# EAGLE board CT_schematic (EAGLE 7.6.0)

Size 100 x 80 mm. Coordinates in mm from the lower left corner, seen from the top.
Outline: 0,0 100,0 100,80 0,80 0,0
Copper layers (1*16): Top 0.035mm / dielectric 1.5mm / Bottom 0.035mm
Design rules "default": minimum track width 10mil, minimum drill 24mil, track to track 8mil, track to pad 8mil, pad to pad 8mil, via to via 8mil, smd to smd 8mil, copper to edge 40mil, drill to drill 8mil, minimum pad ring 10mil, minimum via ring 8mil, stop-mask expansion 4mil, vias tented up to drill 0mil, thermal gap 10mil

## Footprints (pad centres in the part's own frame; a part is rotated, then mirrored left to right if it is on the bottom)
C0603 = smd 0.8 x 0.8: 1 -0.762,0; 2 0.762,0
C0402 = smd 0.5 x 0.5: 1 -0.508,0; 2 0.508,0
C0805 = smd 1.2 x 1.3: 1 -1.016,0; 2 1.016,0
C1206 = smd 1.3 x 1.6: 1 -1.524,0; 2 1.524,0
C1210 = smd 1.2 x 2.5: 1 -1.524,0; 2 1.524,0
EXV-9H = smd 3.505 x 1.676: 1 -2.857,0; 2 2.857,0
L0603 = smd 0.8 x 0.8: 1 -0.762,0; 2 0.762,0
PJ-037B_PACKAGE = drill 3.7 square: 1 12,0 | drill 3.2 square: 2 6,0
R0603 = smd 0.8 x 0.8: 1 -0.762,0; 2 0.762,0
LQFP100 = smd 0.3 x 1.2: 1 -6,-7.75; 2 -5.5,-7.75; 3 -5,-7.75; 4 -4.5,-7.75; 5 -4,-7.75; 6 -3.5,-7.75; 7 -3,-7.75; 8 -2.5,-7.75; 9 -2,-7.75; 10 -1.5,-7.75; 11 -1,-7.75; 12 -0.5,-7.75; 13 0,-7.75; 14 0.5,-7.75; 15 1,-7.75; 16 1.5,-7.75; 17 2,-7.75; 18 2.5,-7.75; 19 3,-7.75; 20 3.5,-7.75; 21 4,-7.75; 22 4.5,-7.75; 23 5,-7.75; 24 5.5,-7.75; 25 6,-7.75; 51 6,7.75; 52 5.5,7.75; 53 5,7.75; 54 4.5,7.75; 55 4,7.75; 56 3.5,7.75; 57 3,7.75; 58 2.5,7.75; 59 2,7.75; 60 1.5,7.75; 61 1,7.75; 62 0.5,7.75; 63 0,7.75; 64 -0.5,7.75; 65 -1,7.75; 66 -1.5,7.75; 67 -2,7.75; 68 -2.5,7.75; 69 -3,7.75; 70 -3.5,7.75; 71 -4,7.75; 72 -4.5,7.75; 73 -5,7.75; 74 -5.5,7.75; 75 -6,7.75 | smd 1.2 x 0.3: 26 7.75,-6; 27 7.75,-5.5; 28 7.75,-5; 29 7.75,-4.5; 30 7.75,-4; 31 7.75,-3.5; 32 7.75,-3; 33 7.75,-2.5; 34 7.75,-2; 35 7.75,-1.5; 36 7.75,-1; 37 7.75,-0.5; 38 7.75,0; 39 7.75,0.5; 40 7.75,1; 41 7.75,1.5; 42 7.75,2; 43 7.75,2.5; 44 7.75,3; 45 7.75,3.5; 46 7.75,4; 47 7.75,4.5; 48 7.75,5; 49 7.75,5.5; 50 7.75,6; 76 -7.75,6; 77 -7.75,5.5; 78 -7.75,5; 79 -7.75,4.5; 80 -7.75,4; 81 -7.75,3.5; 82 -7.75,3; 83 -7.75,2.5; 84 -7.75,2; 85 -7.75,1.5; 86 -7.75,1; 87 -7.75,0.5; 88 -7.75,0; 89 -7.75,-0.5; 90 -7.75,-1; 91 -7.75,-1.5; 92 -7.75,-2; 93 -7.75,-2.5; 94 -7.75,-3; 95 -7.75,-3.5; 96 -7.75,-4; 97 -7.75,-4.5; 98 -7.75,-5; 99 -7.75,-5.5; 100 -7.75,-6
SOT-23-6 = smd 1.1 x 0.6: 1 -1.4,0.95; 2 -1.4,0; 3 -1.4,-0.95; 4 1.4,-0.95; 5 1.4,0; 6 1.4,0.95
10100565 = smd 0.8 x 2.35: 1 0,0; 2 1.25,0; 3 2.55,0; 4 4.25,0; 5 5.43,0; 6 6.68,0; 7 7.93,0; 8 9.18,0; 9 11.67,0; 10 14.18,0; 11 15.43,0; 12 16.68,0; 13 17.93,0; 14 19.18,0; 15 21.68,0 | smd 1.5 x 3.1: 16 23.495,-1.375; 20 25.685,-22.875 | smd 1.55 x 3.1: 17 -1.815,-1.375; 21 -1.815,-22.875 | drill 1.1 pad 1.1: 18 21.68,-2.375; 19 0.68,-2.375
TST-110-05-T-D-RA = drill 1 pad 1.7 square: 1 0,0 | drill 1 pad 1.7: 2 0,2.54; 3 2.54,0; 4 2.54,2.54; 5 5.08,0; 6 5.08,2.54; 7 7.62,0; 8 7.62,2.54; 9 10.16,0; 10 10.16,2.54; 11 12.7,0; 12 12.7,2.54; 13 15.24,0; 14 15.24,2.54; 15 17.78,0; 16 17.78,2.54; 17 20.32,0; 18 20.32,2.54; 19 22.86,0; 20 22.86,2.54
TDFN-8/6MM = smd 0.3 x 0.75: 1 0,0; 2 0.5,0; 3 1,0; 4 1.5,0; 5 1.5,3; 6 1,3; 7 0.5,3; 8 0,3
VFBGA-63 = smd 0.4 x 0.4: A1 -3.6,4.4; A2 -2.8,4.4; A9 2.8,4.4; A10 3.6,4.4; B1 -3.6,3.6; B9 2.8,3.6; B10 3.6,3.6; C3 -2,2.8; C4 -1.2,2.8; C5 -0.4,2.8; C6 0.4,2.8; C7 1.2,2.8; C8 2,2.8; D3 -2,2; D4 -1.2,2; D5 -0.4,2; D6 0.4,2; D7 1.2,2; D8 2,2; E3 -2,1.2; E4 -1.2,1.2; E5 -0.4,1.2; E6 0.4,1.2; E7 1.2,1.2; E8 2,1.2; F3 -2,0.4; F4 -1.2,0.4; F5 -0.4,0.4; F6 0.4,0.4; F7 1.2,0.4; F8 2,0.4; G3 -2,-0.4; G4 -1.2,-0.4; G5 -0.4,-0.4; G6 0.4,-0.4; G7 1.2,-0.4; G8 2,-0.4; H3 -2,-1.2; H4 -1.2,-1.2; H5 -0.4,-1.2; H6 0.4,-1.2; H7 1.2,-1.2; H8 2,-1.2; J3 -2,-2; J4 -1.2,-2; J5 -0.4,-2; J6 0.4,-2; J7 1.2,-2; J8 2,-2; K3 -2,-2.8; K4 -1.2,-2.8; K5 -0.4,-2.8; K6 0.4,-2.8; K7 1.2,-2.8; K8 2,-2.8; L1 -3.6,-3.6; L2 -2.8,-3.6; L9 2.8,-3.6; L10 3.6,-3.6; M1 -3.6,-4.4; M2 -2.8,-4.4; M9 2.8,-4.4; M10 3.6,-4.4
USB-A-H = drill 0.914: 1 2.718,3.493; 2 2.718,1.003; 3 2.718,-1.003; 4 2.718,-3.493 | drill 2.311: 5 0,-6.566; 6 0,6.566
SOT143B = smd 1 x 0.7: 1 -0.75,-1 | smd 0.6 x 0.7: 2 0.95,-1; 3 0.95,1; 4 -0.95,1
ABS07-32.768KHZ-7-T = smd 1.1 x 2.4: 1 -2.5,0; 2 0,0
ASFL1 = smd 1.7 x 1.5: 1 -1.27,-1.1; 2 1.27,-1.1; 3 1.27,1.1; 4 -1.27,1.1
WSON-8 = smd 0.3 x 0.6: 1 -0.75,0; 2 0.05,0; 3 0.85,0; 4 1.65,0; 5 1.65,3.8; 6 0.85,3.8; 7 0.05,3.8; 8 -0.75,3.8 | smd 3 x 2.6: PAD 0.45,1.9
SON-6 = smd 0.55 x 0.3: 1 -0.355,0.5 | smd 0.52 x 0.3: 2 -0.37,0; 3 -0.37,-0.5; 4 0.37,-0.5; 5 0.37,0; 6 0.37,0.5
SW_4-1437565-2 = smd 1.4 x 2.1: 1 -2.23,4.55; 2 -2.23,-4.55; 3 2.23,4.55; 4 2.23,-4.55
LGM67K-G1J2-24-Z = smd 0.8 x 1.4: A -2,0; C 0,0
NC7SZ125M5X = smd 1.3 x 0.7: 1 -1.3,0.95; 2 -1.3,0; 3 -1.3,-0.95; 4 1.3,-0.95; 5 1.3,0.95

## Placement (x,y rotation side)
C1  1e-06  [C0603]  -39.37,82.55 0 top  (outside the outline)
C2  1e-07  [C0603]  -43.18,82.55 0 top  (outside the outline)
C3  1e-07  [C0603]  -46.99,82.55 0 top  (outside the outline)
C4  1e-07  [C0603]  -50.8,82.55 0 top  (outside the outline)
C5  1e-07  [C0603]  -54.61,82.55 0 top  (outside the outline)
C6  1e-07  [C0603]  -58.42,82.55 0 top  (outside the outline)
C7  1e-07  [C0603]  -62.23,82.55 0 top  (outside the outline)
C8  4.7e-06  [C0603]  -24.13,82.55 0 top  (outside the outline)
C9  2.2e-06  [C0603]  -27.94,82.55 0 top  (outside the outline)
C10  2.2e-06  [C0603]  -31.75,82.55 0 top  (outside the outline)
C11  1e-08  [C0603]  -66.04,82.55 0 top  (outside the outline)
C12  1e-06  [C0603]  -69.85,82.55 0 top  (outside the outline)
C13  1e-11  [C0402]  -45.72,87.63 0 top  (outside the outline)
C14  1e-11  [C0402]  -49.53,87.63 0 top  (outside the outline)
C15  1e-07  [C0402]  -53.34,87.63 0 top  (outside the outline)
C16  1e-05  [C0805]  -21.59,71.12 0 top  (outside the outline)
C17  1e-07  [C0402]  -57.15,87.63 0 top  (outside the outline)
C18  1e-08  [C0402]  -60.96,87.63 0 top  (outside the outline)
C19  1e-07  [C0402]  -64.77,87.63 0 top  (outside the outline)
C20  1e-07  [C0402]  -68.58,87.63 0 top  (outside the outline)
C21  1e-07  [C0402]  -72.39,87.63 0 top  (outside the outline)
C22  1e-07  [C0402]  -76.2,87.63 0 top  (outside the outline)
C23  2.2e-06  [C0603]  -35.56,82.55 0 top  (outside the outline)
C24  1e-08  [C0402]  -80.01,87.63 0 top  (outside the outline)
C25  1e-08  [C0402]  -15.24,92.71 0 top  (outside the outline)
C26  1e-05  [C1206]  -60.96,63.5 0 top  (outside the outline)
C27  1e-05  [C1210]  -48.26,64.77 0 top  (outside the outline)
C28  1e-08  [C0402]  -19.05,92.71 0 top  (outside the outline)
C29  1e-05  [C1206]  -67.31,63.5 0 top  (outside the outline)
C30  1e-05  [C1210]  -54.61,64.77 0 top  (outside the outline)
C31  1e-07  [C0402]  -22.86,92.71 0 top  (outside the outline)
C32  0.0001  [EXV-9H]  -54.61,57.15 0 top  (outside the outline)
C33  0.0001  [EXV-9H]  -66.04,57.15 0 top  (outside the outline)
C34  1e-08  [C0402]  -26.67,92.71 0 top  (outside the outline)
C35  1e-08  [C0402]  -30.48,92.71 0 top  (outside the outline)
F1  240.0  [L0603]  -73.66,82.55 0 top  (outside the outline)
J1  PJ-037B  [PJ-037B_PACKAGE]  -27.94,36.83 0 top  (outside the outline)
R2  1000.0  [R0603]  -77.47,82.55 0 top  (outside the outline)
R4  4700.0  [R0603]  -81.28,82.55 0 top  (outside the outline)
R5  2200.0  [R0603]  -15.24,87.63 0 top  (outside the outline)
R6  2200.0  [R0603]  -19.05,87.63 0 top  (outside the outline)
R7  47000.0  [R0603]  -35.56,77.47 0 top  (outside the outline)
R8  10000.0  [R0603]  -40.64,77.47 0 top  (outside the outline)
R9  1270.0  [R0603]  -22.86,87.63 0 top  (outside the outline)
R10  10000.0  [R0603]  -45.72,77.47 0 top  (outside the outline)
R11  10000.0  [R0603]  -50.8,77.47 0 top  (outside the outline)
R12  100000.0  [R0603]  -26.67,71.12 0 top  (outside the outline)
R13  100000.0  [R0603]  -31.75,71.12 0 top  (outside the outline)
R14  100000.0  [R0603]  -36.83,71.12 0 top  (outside the outline)
R15  100000.0  [R0603]  -41.91,71.12 0 top  (outside the outline)
R16  100000.0  [R0603]  -46.99,71.12 0 top  (outside the outline)
R17  100000.0  [R0603]  -52.07,71.12 0 top  (outside the outline)
R18  100000.0  [R0603]  -57.15,71.12 0 top  (outside the outline)
R19  100000.0  [R0603]  -62.23,71.12 0 top  (outside the outline)
R20  100000.0  [R0603]  -67.31,71.12 0 top  (outside the outline)
R21  100000.0  [R0603]  -72.39,71.12 0 top  (outside the outline)
R22  100000.0  [R0603]  -77.47,71.12 0 top  (outside the outline)
R23  10000.0  [R0603]  -55.88,77.47 0 top  (outside the outline)
R24  10000.0  [R0603]  -60.96,77.47 0 top  (outside the outline)
R25  10000.0  [R0603]  -66.04,77.47 0 top  (outside the outline)
R26  10000.0  [R0603]  -71.12,77.47 0 top  (outside the outline)
R27  10000.0  [R0603]  -76.2,77.47 0 top  (outside the outline)
R28  10000.0  [R0603]  -81.28,77.47 0 top  (outside the outline)
R29  100000.0  [R0603]  -15.24,77.47 0 top  (outside the outline)
R30  2231.0  [R0603]  -26.67,87.63 0 top  (outside the outline)
R31  1000.0  [R0603]  -30.48,87.63 0 top  (outside the outline)
R32  100000.0  [R0603]  -20.32,77.47 0 top  (outside the outline)
R33  3900.0  [R0603]  -34.29,87.63 0 top  (outside the outline)
R34  1000.0  [R0603]  -38.1,87.63 0 top  (outside the outline)
R35  10000.0  [R0603]  -15.24,82.55 0 top  (outside the outline)
R36  10000.0  [R0603]  -20.32,82.55 0 top  (outside the outline)
R37  9100.0  [R0603]  -41.91,87.63 0 top  (outside the outline)
R38  680000.0  [R0603]  -25.4,77.47 0 top  (outside the outline)
R39  120000.0  [R0603]  -30.48,77.47 0 top  (outside the outline)
U1  STM32F215VET6  [LQFP100]  -54.61,8.89 0 top  (outside the outline)
U2  MAX4995AAUT+T  [SOT-23-6]  -72.39,63.5 0 top  (outside the outline)
U3  10100565  [10100565]  -40.64,25.4 0 top  (outside the outline)
U4  TST-110-05-T-D-RA  [TST-110-05-T-D-RA]  -46.99,54.61 0 top  (outside the outline)
U5  24AA04-I/MC  [TDFN-8/6MM]  -68.58,34.29 0 top  (outside the outline)
U6  mt29f4g08abadah4  [VFBGA-63]  -34.29,35.56 0 top  (outside the outline)
U7  61400416021  [USB-A-H]  -69.85,8.89 0 top  (outside the outline)
U8  prtr5v0u2ax  [SOT143B]  -43.18,92.71 0 top  (outside the outline)
U9  ABS07-32.768KHZ-7-T  [ABS07-32.768KHZ-7-T]  -27.94,64.77 0 top  (outside the outline)
U10  ASFL1-25MHZ-NCS  [ASFL1]  -67.31,48.26 0 top  (outside the outline)
U11  LP3878SDX-ADJ/NOPB  [WSON-8]  -30.48,46.99 0 top  (outside the outline)
U12  LP3878SDX-ADJ/NOPB  [WSON-8]  -50.8,46.99 0 top  (outside the outline)
U13  TPS3895ADRYR  [SON-6]  -46.99,91.44 0 top  (outside the outline)
U14  4-1437565-2  [SW_4-1437565-2]  -54.61,35.56 0 top  (outside the outline)
U15  Q65110A2395  [LGM67K-G1J2-24-Z]  -36.83,64.77 0 top  (outside the outline)
U16  nc7sz125m5x  [NC7SZ125M5X]  -77.47,63.5 0 top  (outside the outline)
U17  nc7sz125m5x  [NC7SZ125M5X]  -15.24,71.12 0 top  (outside the outline)

## Library data of the parts
C1-C35 F1 J1 R2 R4-R39 U1-U17 = circuit_tree

## Nets
CLK_CRYSTAL_U1_8: C13.1 U1.8 U9.1
CLK_CRYSTAL_U1_9: C14.1 U1.9 U9.2
CLK_U1_12: U1.12 U10.3
GND: C1.2 C2.2 C3.2 C4.2 C5.2 C6.2 C7.2 C8.2 C9.2 C10.2 C11.2 C12.2 C13.2 C14.2 C15.2 C16.2 C17.2 C18.2 C19.2 C20.2 C21.2 C22.2 C23.2 C24.2 C25.2 C26.2 C27.2 C28.2 C29.2 C30.2 C31.2 C32.2 C33.2 C34.2 C35.2 J1.2 R2.2 R7.2 R8.2 R9.2 R11.2 R31.2 R34.2 R37.2 R39.2 U1.10 U1.20 U1.27 U1.74 U2.2 U3.6 U3.10 U3.12 U3.16 U3.17 U3.20 U3.21 U4.4 U4.6 U4.8 U4.10 U4.12 U4.14 U4.16 U4.18 U4.20 U5.4 U5.7 U6.C5 U6.F7 U6.K3 U6.K8 U7.4 U7.5 U7.6 U8.1 U10.2 U11.3 U11.PAD U12.3 U12.PAD U13.2 U15.C U16.2 U16.3 U17.1 U17.3
NET_U1_14: R4.1 U1.14 U17.4
NET_U1_22: C11.1 C12.1 F1.1 U1.21 U1.22
NET_U1_49: C9.1 U1.49
NET_U1_69: R9.1 U1.69
NET_U1_73: C10.1 U1.73
NET_U1_92: R5.1 U1.92 U5.6
NET_U1_93: R6.1 U1.93 U5.5
NET_U1_94: R8.1 U1.94
NET_U1_97: U15.A
NET_U1_98: U14.3 U14.4
NET_U2_3: R7.1 U2.3
NET_U3_1: R14.1 U3.1
NET_U3_2: R13.1 U3.2
NET_U3_18: U3.18 U3.19
NET_U6_C3: R28.1 U6.C3
NET_U11_1: C25.1 U11.1
NET_U11_6: R30.2 R31.1 U11.6
NET_U11_8: R29.1 U11.8
NET_U12_1: C28.1 U12.1
NET_U12_6: R33.2 R34.1 U12.6
NET_U12_8: R32.1 U12.8
NET_U13_1: R36.1 R37.1 U13.1
NET_U13_3: R38.2 R39.1 U13.3
NET_U13_4: R35.1 U13.4 U16.4 U17.2
NET_U14_1: R2.1 U14.1 U14.2
PROC_FSMC_D0: U1.61 U6.H4
PROC_FSMC_D1: U1.62 U6.J4
PROC_FSMC_D2: U1.81 U6.K4
PROC_FSMC_D3: U1.82 U6.K5
PROC_FSMC_D4: U1.38 U6.K6
PROC_FSMC_D5: U1.39 U6.J7
PROC_FSMC_D6: U1.40 U6.K7
PROC_FSMC_D7: U1.41 U6.J8
PROC_FSMC_NCE2: R25.1 U1.88 U6.C6
PROC_FSMC_NOE: R27.1 U1.85 U6.D4
PROC_FSMC_NWAIT: R24.1 U1.87 U6.C8
PROC_FSMC_NWE: R26.1 U1.86 U6.C7
PROC_GPIO_TO_U1_USB_FAULT: R10.1 U1.2 U2.6
PROC_GPIO_TO_U1_VBUS_EN: R11.1 U1.1 U2.4
PROC_SDIO_CK: R12.1 U1.80 U3.8
PROC_SDIO_D0: R15.1 U1.65 U3.4
PROC_SDIO_D1: R16.1 U1.66 U3.3
PROC_SDIO_D2: R17.1 U1.78 U3.15
PROC_SDIO_D3: R18.1 U1.79 U3.14
PROC_SDIO_D4: R19.1 U1.95 U3.13
PROC_SDIO_D5: R20.1 U1.96 U3.11
PROC_SDIO_D6: R21.1 U1.63 U3.7
PROC_SDIO_D7: R22.1 U1.64 U3.5
PROC_SYS_JTCK_SWCLK: U1.76 U4.9
PROC_SYS_JTDO_SWO: U1.89 U4.13
PROC_SYS_JTMS_SWDIO: U1.72 U4.7
PROC_USB_OTG_FS_DM: U1.70 U7.2 U8.3
PROC_USB_OTG_FS_DP: U1.71 U7.3 U8.2
PROC_USB_OTG_FS_VBUS: U1.68 U2.1 U7.1 U8.4
RST_OUT_U4_SRESET_B: R23.1 U4.15 U16.1
VCC_S1_8V2: C26.1 C29.1 C32.1 C33.1 J1.1 R29.2 R32.2 U11.4 U12.4
VCC_TIER1_3V3: C1.1 C2.1 C3.1 C4.1 C5.1 C6.1 C7.1 C8.1 C15.1 C16.1 C17.1 C18.1 C19.1 C20.1 C21.1 C22.1 C23.1 C24.1 C27.1 C31.1 C34.1 C35.1 F1.2 R4.2 R5.2 R6.2 R10.2 R12.2 R13.2 R14.2 R15.2 R16.2 R17.2 R18.2 R19.2 R20.2 R21.2 R22.2 R23.2 R24.2 R25.2 R26.2 R27.2 R28.2 R30.1 R35.2 R36.2 R38.1 U1.6 U1.11 U1.19 U1.28 U1.50 U1.75 U1.100 U3.9 U4.1 U5.8 U6.D3 U6.G4 U6.H8 U6.J6 U10.4 U11.5 U13.6 U16.5 U17.5
VCC_TIER1_5V0: C30.1 R33.1 U2.5 U12.5

## Tracks (layer width: path | path; a pad name or v marks a point on that pad's centre or on a via)
CLK_CRYSTAL_U1_8  (2 unrouted)
CLK_CRYSTAL_U1_9  (2 unrouted)
CLK_U1_12  (1 unrouted)
GND  (86 unrouted)
NET_U1_14  (2 unrouted)
NET_U1_22  (4 unrouted)
NET_U1_49  (1 unrouted)
NET_U1_69  (1 unrouted)
NET_U1_73  (1 unrouted)
NET_U1_92  (2 unrouted)
NET_U1_93  (2 unrouted)
NET_U1_94  (1 unrouted)
NET_U1_98  (1 unrouted)
NET_U2_3  (1 unrouted)
NET_U3_1  (1 unrouted)
NET_U3_2  (1 unrouted)
NET_U3_18  (1 unrouted)
NET_U6_C3  (1 unrouted)
NET_U11_1  (1 unrouted)
NET_U11_6  (2 unrouted)
NET_U11_8  (1 unrouted)
NET_U12_1  (1 unrouted)
NET_U12_6  (2 unrouted)
NET_U12_8  (1 unrouted)
NET_U13_1  (2 unrouted)
NET_U13_3  (2 unrouted)
NET_U13_4  (3 unrouted)
NET_U14_1  (2 unrouted)
PROC_FSMC_D0  (1 unrouted)
PROC_FSMC_D1  (1 unrouted)
PROC_FSMC_D2  (1 unrouted)
PROC_FSMC_D3  (1 unrouted)
PROC_FSMC_D4  (1 unrouted)
PROC_FSMC_D5  (1 unrouted)
PROC_FSMC_D6  (1 unrouted)
PROC_FSMC_D7  (1 unrouted)
PROC_FSMC_NCE2  (2 unrouted)
PROC_FSMC_NOE  (2 unrouted)
PROC_FSMC_NWAIT  (2 unrouted)
PROC_FSMC_NWE  (2 unrouted)
PROC_GPIO_TO_U1_USB_FAULT  (2 unrouted)
PROC_GPIO_TO_U1_VBUS_EN  (2 unrouted)
PROC_SDIO_CK  (2 unrouted)
PROC_SDIO_D0  (2 unrouted)
PROC_SDIO_D1  (2 unrouted)
PROC_SDIO_D2  (2 unrouted)
PROC_SDIO_D3  (2 unrouted)
PROC_SDIO_D4  (2 unrouted)
PROC_SDIO_D5  (2 unrouted)
PROC_SDIO_D6  (2 unrouted)
PROC_SDIO_D7  (2 unrouted)
PROC_SYS_JTCK_SWCLK  (1 unrouted)
PROC_SYS_JTDO_SWO  (1 unrouted)
PROC_SYS_JTMS_SWDIO  (1 unrouted)
PROC_USB_OTG_FS_DM  (2 unrouted)
PROC_USB_OTG_FS_DP  (2 unrouted)
PROC_USB_OTG_FS_VBUS  (3 unrouted)
RST_OUT_U4_SRESET_B  (2 unrouted)
VCC_S1_8V2  (8 unrouted)
VCC_TIER1_3V3  (66 unrouted)
VCC_TIER1_5V0  (3 unrouted)